# Altium PCB Sensor_Box_CAN_Shutter_CTRL.PCBDOC (part 1 of 2)
Units mil, origin at the board's own origin, x right, y up, seen from the top; angles counter-clockwise.
Board outline 1496.06 x 1407.48 mil, 2 copper layers (Top, Bot), stack 61.855 mil thick; 75 components, 60 nets, 235 pads, 72 vias.
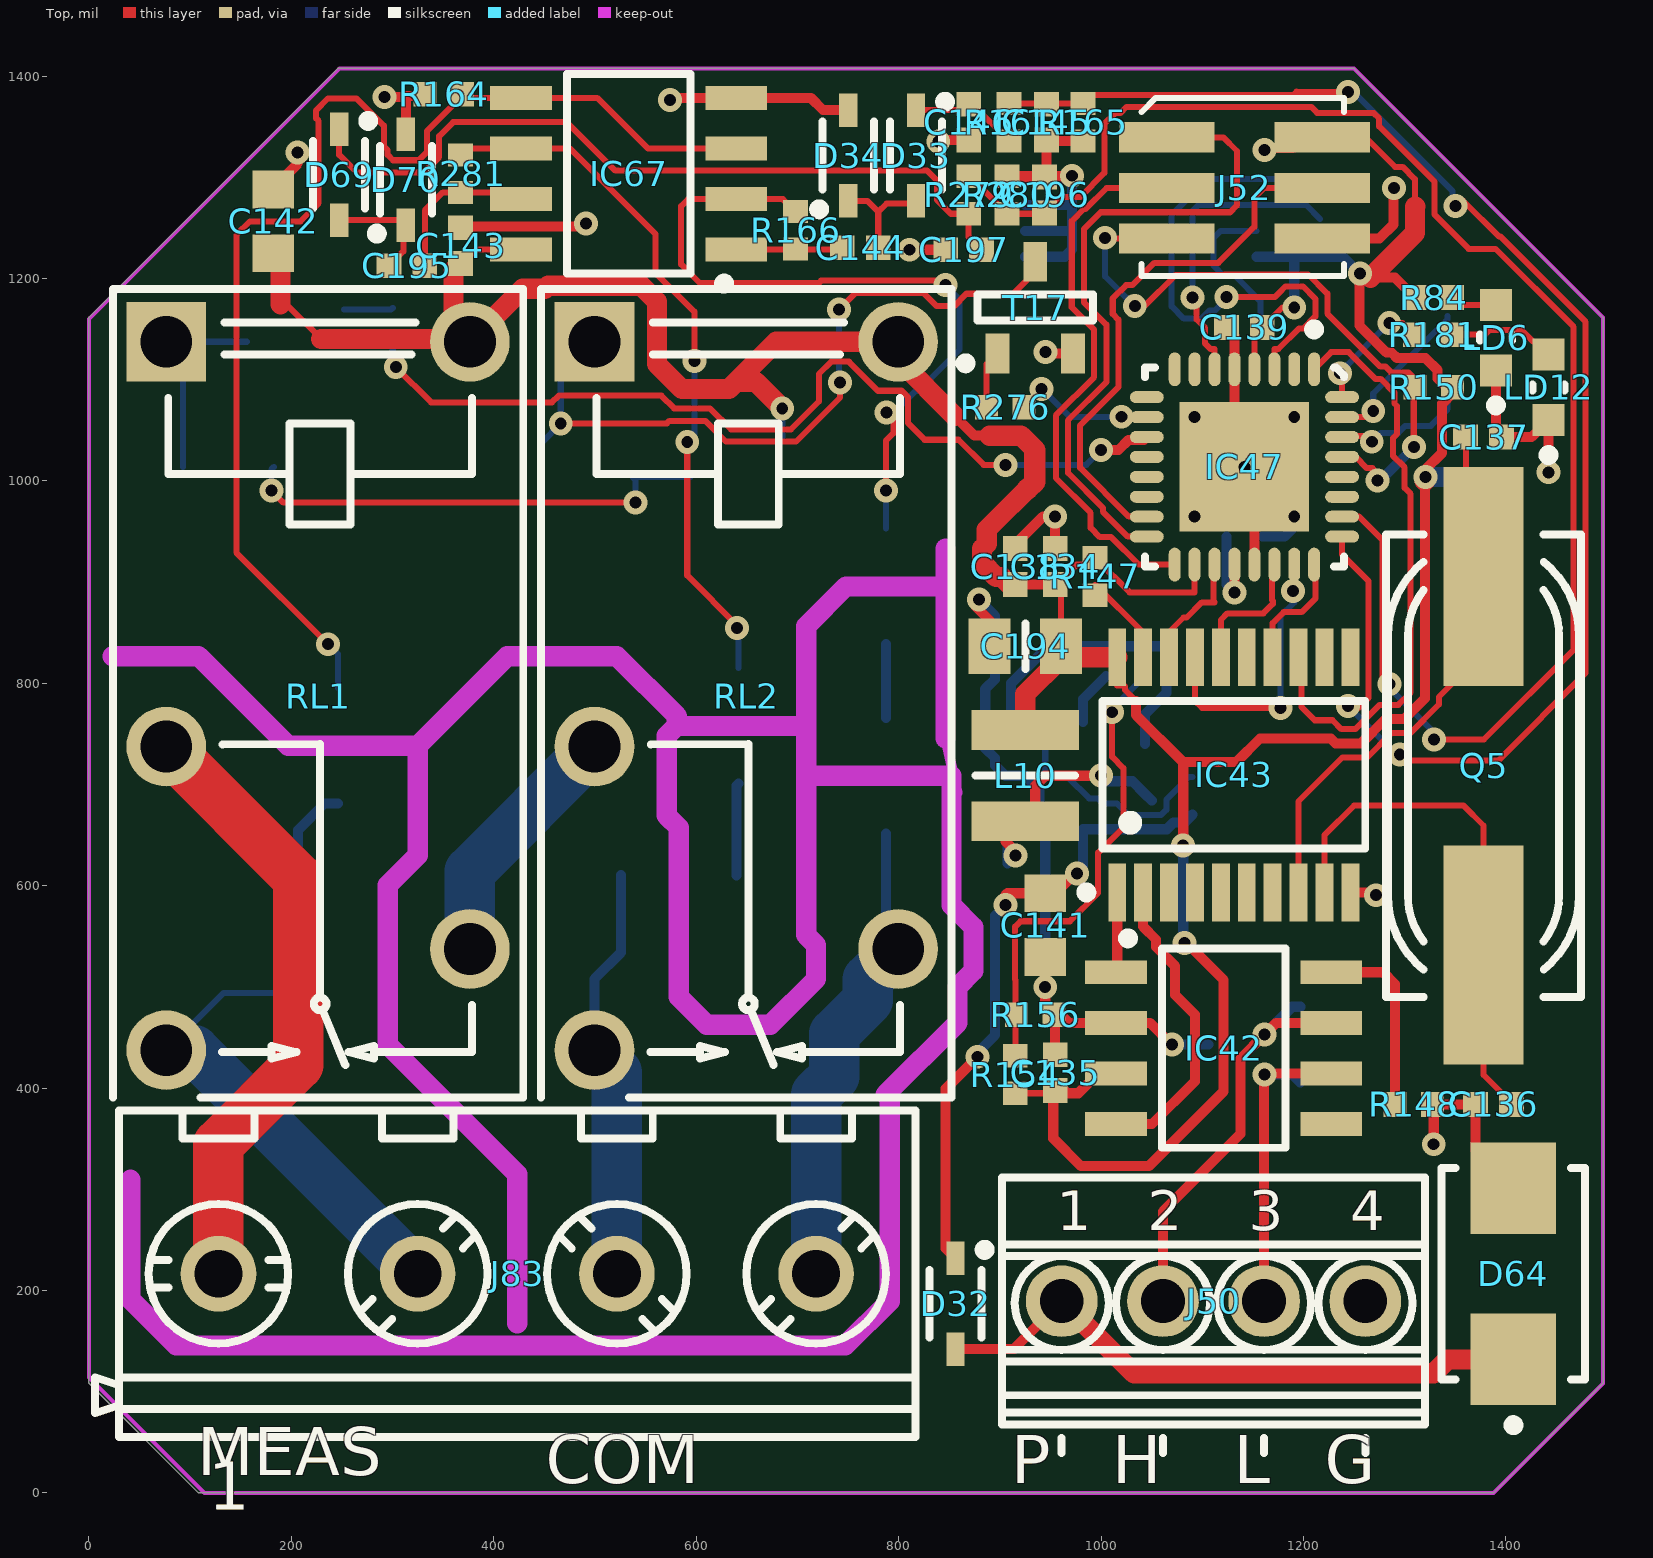
[diagram p0: Top view]
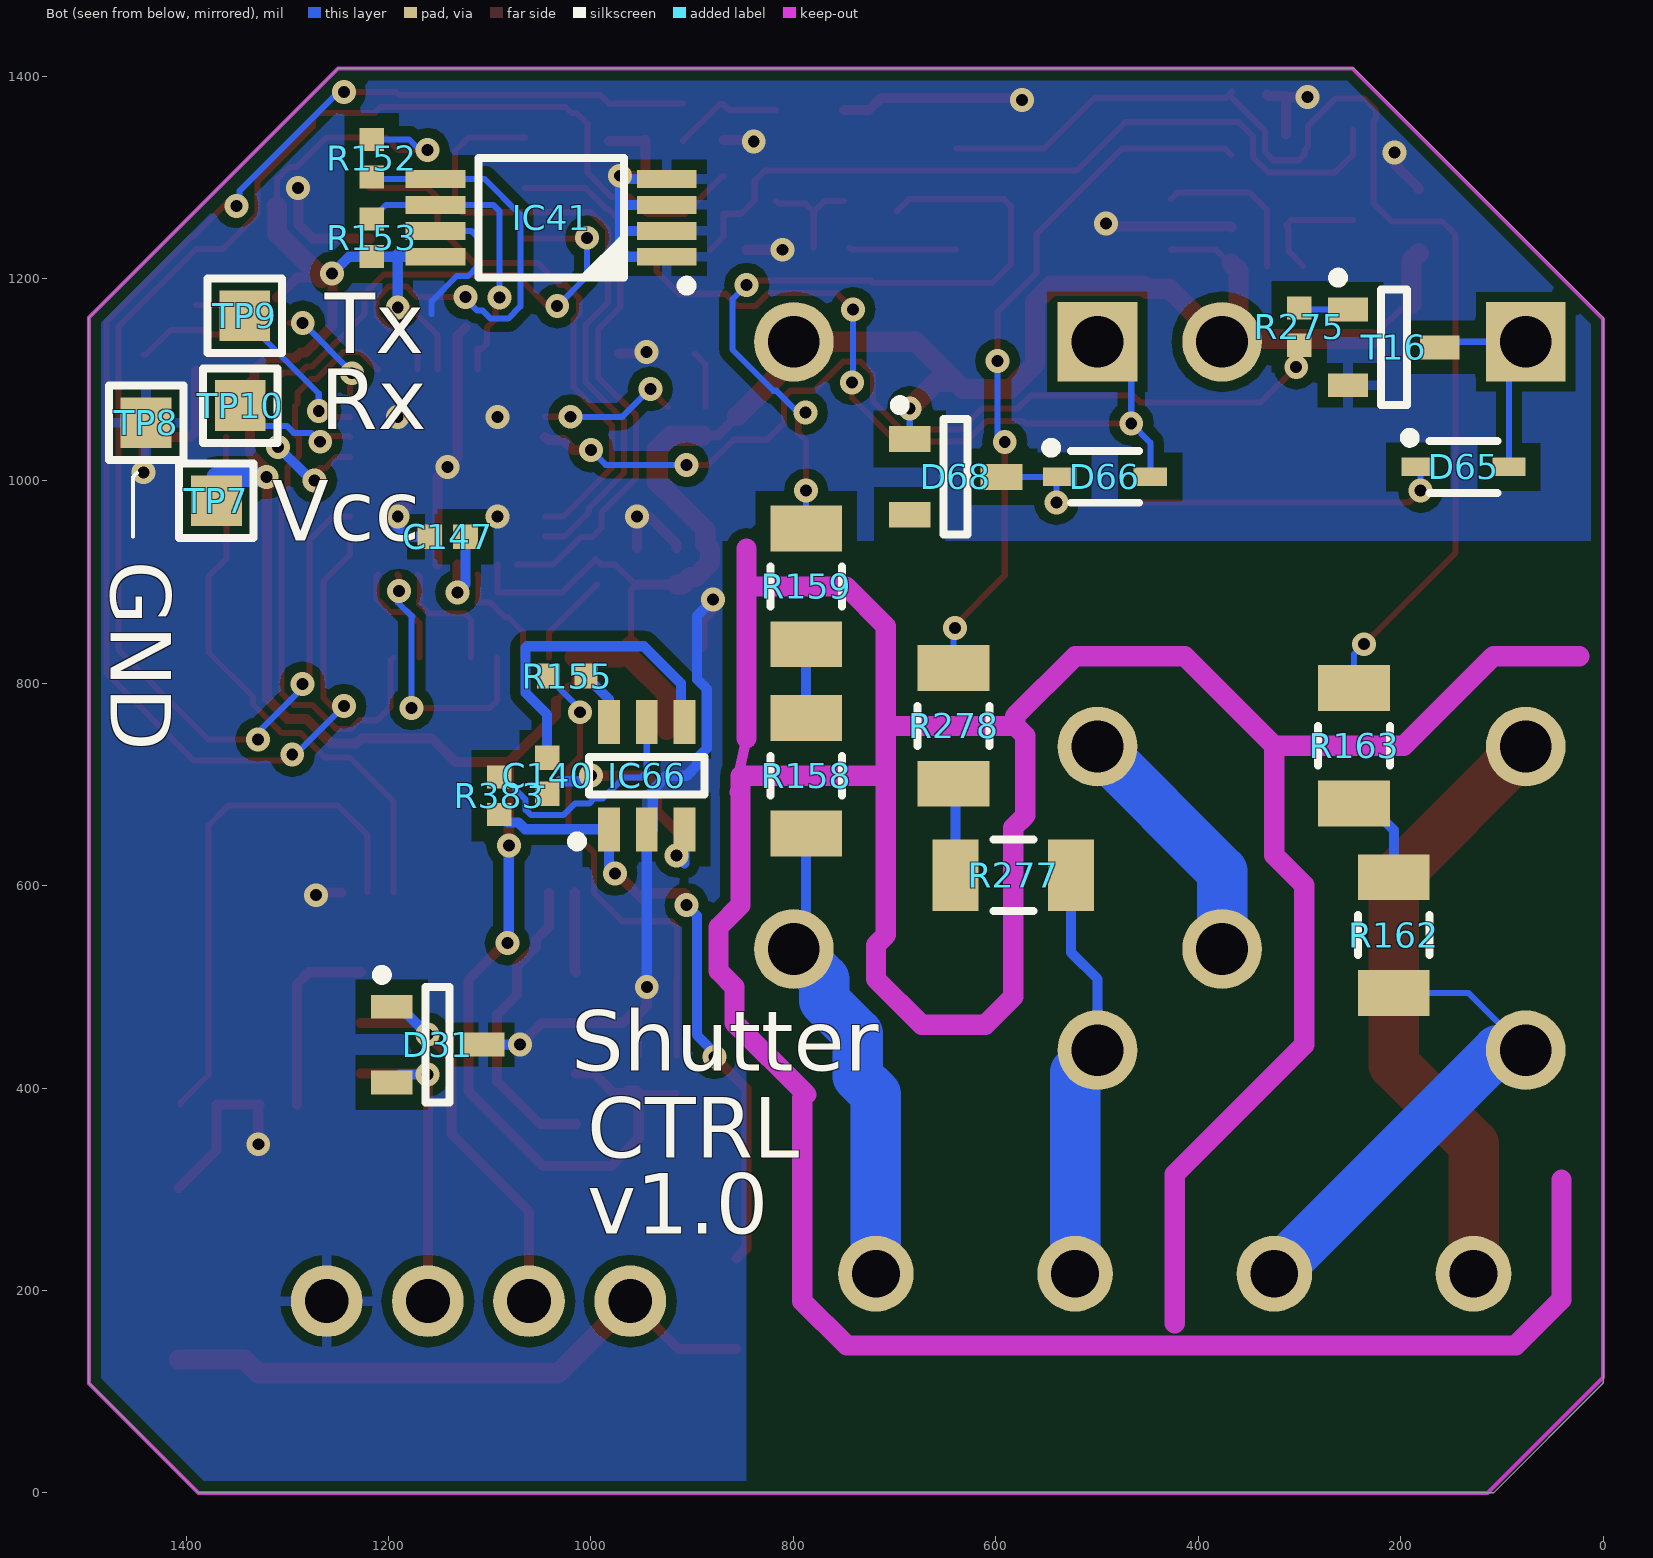
[diagram p1: Bot view, seen from below]
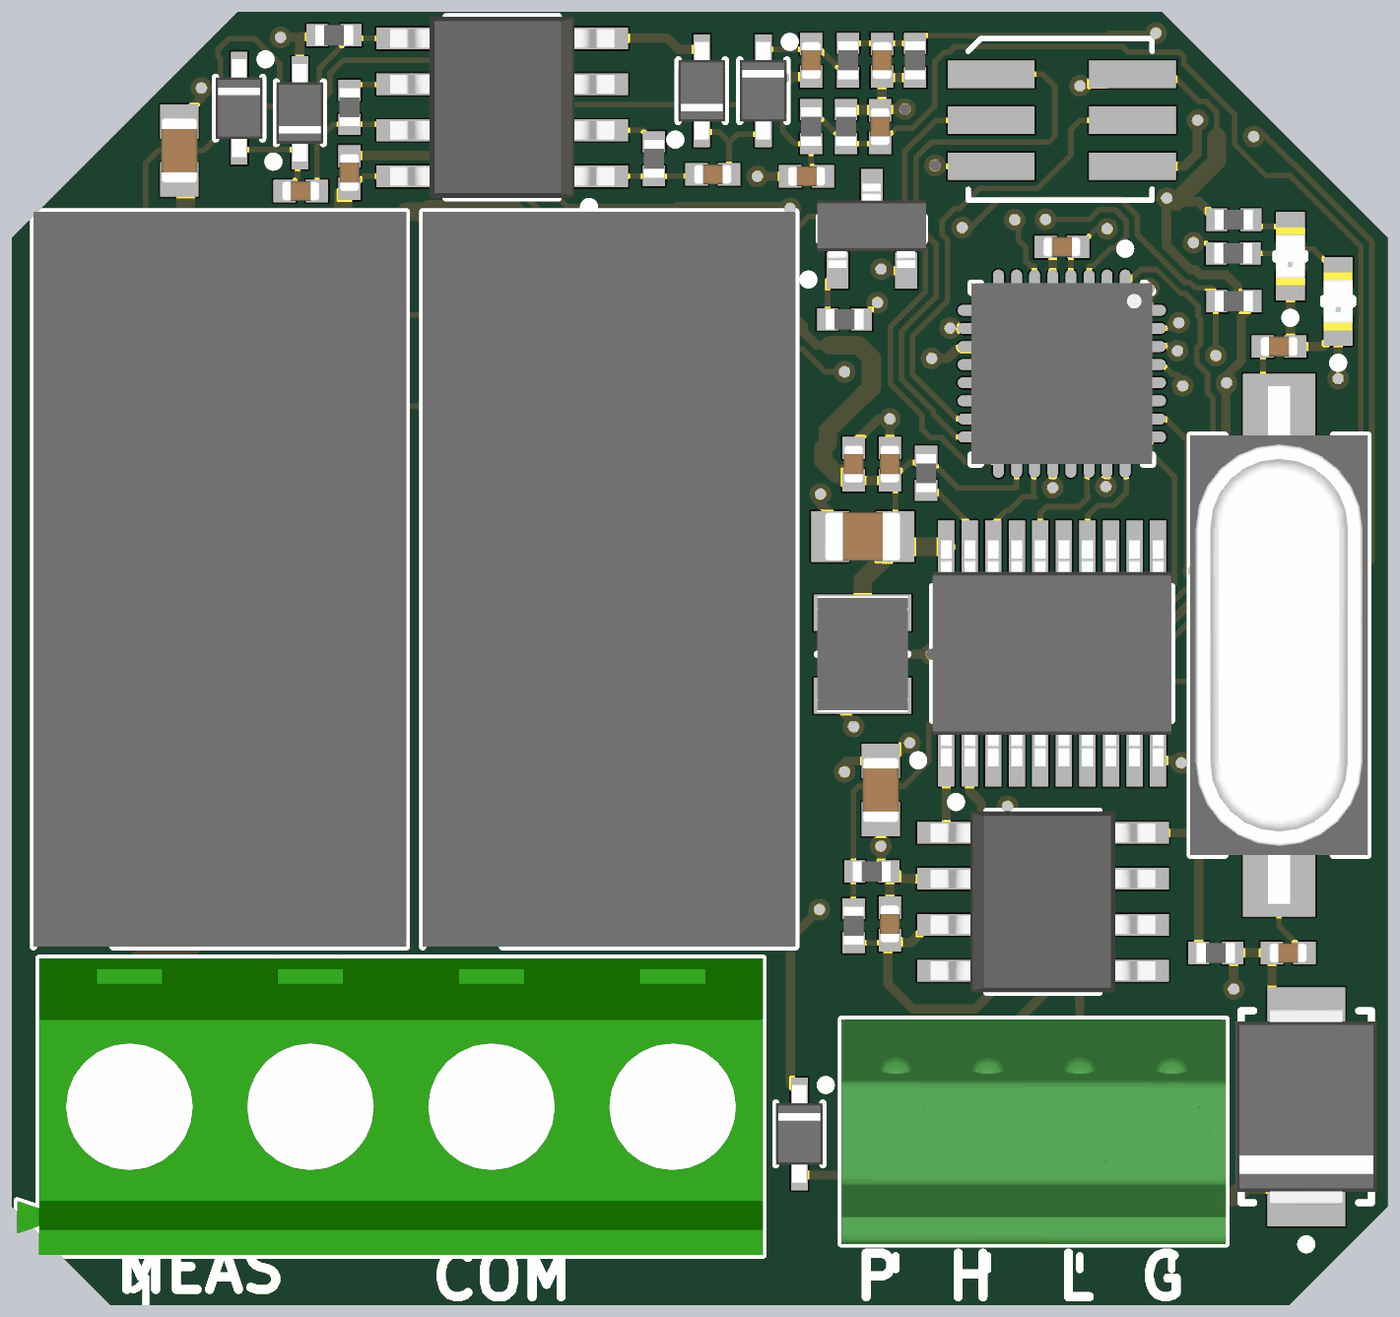
[diagram p2: 3D render of the assembled board from above, using the file's embedded part models]
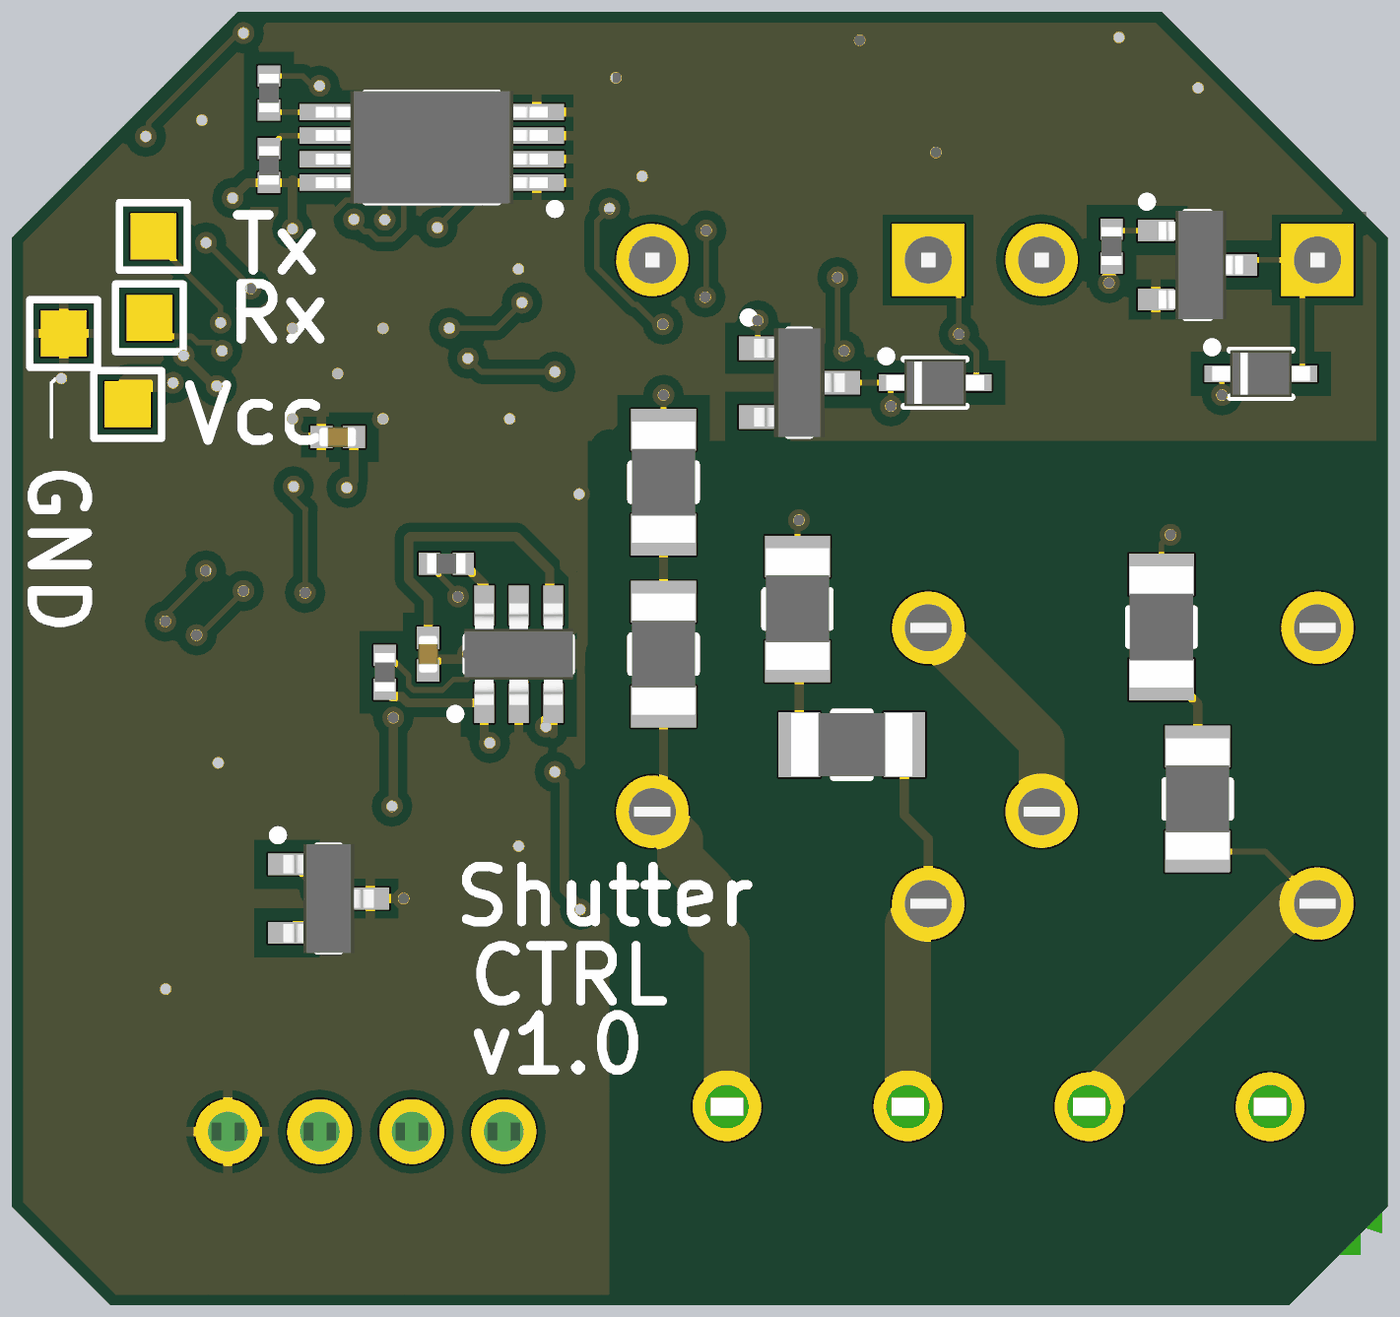
[diagram p3: 3D render of the assembled board from below, using the file's embedded part models]

## Layer stack, top to bottom
TopSolder: solder mask 0.4, Solder Resist, Dk 3.5
Top: signal copper 1.4
Dielectric1: core 59.0551, FR-4, Dk 4.8
Bot: signal copper 1.4
BottomSolder: solder mask 0.4, Solder Resist, Dk 3.5

## Board outline
0,108.27 0,1161.42 246.06,1407.48 1250,1407.48 1496.06,1161.42 1496.06,108.27 1387.8,0 108.27,0

## Design rules (kind name [scope] priority, off if disabled: settings)
Clearance [All] p1: gap=6 ignorepadtopadclearanceinfootprint=FALSE except(10: Arc-Poly Track-Poly THPad-Poly Via-Poly Fill-Poly Poly-Poly Poly-Region Poly-Text Poly-Hole; 15: SMDPad-Poly)
ComponentClearance [All] p1: gap=10 collisioncheckmode=3 verticalgap=0 showdistances=FALSE
DiffPairsRouting [All] p1: maxlimit=10 minlimit=5 mostfreqgap=5 toplayer_minwidth=5 toplayer_maxwidth=15 toplayer_prefwidth=10 bottomlayer_minwidth=5 bottomlayer_maxwidth=15 bottomlayer_prefwidth=10 maxuncoupledlength=500
FabricationTestPointUsage TestPointUsage [All] p1: valid=0 allowmultiple=FALSE
FabricationTestpoint Testpoint [All] p1: side=3 testpointundercomponent=TRUE minsize=40 maxsize=100 preferedsize=60 minholesize=20 maxholesize=40 preferedholesize=32 testpointgrid=1 allowsidetop=TRUE allowsidebottom=TRUE usegrid=TRUE gridtolerance=0.01
HoleSize [All] p1: absolutevalues=TRUE maxlimit=150 minlimit=1 maxpercent=80.000 minpercent=20.000
HoleToHoleClearance [All] p1: gap=1 allowstackedmicrovias=TRUE
MinimumSolderMaskSliver [All] p1: minsoldermaskwidth=0
PlaneClearance [All] p1: clearance=10
PlaneConnect [All] p1: planeconnectstyle=Direct reliefexpansion=20 reliefentries=4 reliefconductorwidth=10 reliefairgap=10
PolygonConnect PolygonConnect_pad [(InPadClass('All Pads'))] p1: connectstyle=Relief reliefconductorwidth=10 reliefentries=4 polygonreliefangle="90 Angle" airgapwidth=10
PolygonConnect [All] p2: connectstyle=Direct reliefconductorwidth=10 reliefentries=4 polygonreliefangle="45 Angle" airgapwidth=10
RoomDefinition Sensor_Box_CAN_Shutter_CTRL [InComponentClass('Sensor_Box_CAN_Shutter_CTRL')] p1 off: confinementstyle=ConfineIn formatcopy=TRUE lockcomponents=FALSE outline 1344.48,-2041.35 8539.34,-2041.35 8539.34,-1106.31 1344.48,-1106.31
RoutingVias RoutingVias_PWR [InNetClass('PWR')] p1: holewidth=31.5 width=47.24 viastyle="Through Hole" minholewidth=19.68 minwidth=31.5 maxholewidth=31.5 maxwidth=47.24
RoutingVias [All] p2: holewidth=11.81 width=23.62 viastyle="Through Hole" minholewidth=11.81 minwidth=23.62 maxholewidth=11.81 maxwidth=23.62
SilkToSilkClearance [All] p1: silktosilkclearance=0
SilkToSolderMaskClearance SilkscreenOverComponentPads [IsPad] p1: minsilkscreentomaskgap=0 clearancetoexposedcopper=TRUE
SolderMaskExpansion [All] p1: expansion=2
Width Width_PWR [InNetClass('PWR')] p1: maxlimit=50 minlimit=10 preferedwidth=20
Width [InNetClass('All Nets')] p2: maxlimit=50 minlimit=6 preferedwidth=10
19 further rules are at their usual default settings.

## Components (designator, comment, footprint, x,y, rotation, side; value= is the part's Value field where it differs from the comment)
C134 "100nF" CAPC1005X55N 954.72,915.35 r270 top
C135 "100nF" CAPC1005X55N 954.72,415.35 r270 top
C136 "18pF" CAPC1005X55N 1387.8,383.86 r0 top
C137 "18pF" CAPC1005X55N 1377.95,1043.31 r180 top
C138 "1uF" CAPC1005X55N 915.35,915.35 r90 top
C139 "100nF" CAPC1005X55N 1141.73,1151.57 r0 top
C140 "1uF" CAPC1005X55N 1043.31,708.66 r270 bottom
C141 "22uF" CAPC1709X100N 944.88,561.02 r90 top
C142 "22uF" CAPC1709X100N 182.18,1256.45 r270 top
C143 "1uF" CAPC1005X55N 367.18,1232.45 r270 top
C144 "1uF" CAPC1005X55N 762.18,1230.45 r0 top
C145 "1uF" CAPC1005X55N 946.18,1354.45 r270 top
C146 "1uF" CAPC1005X55N 869.18,1354.45 r270 top
C147 "1uF" CAPC1005X55N 1141.73,944.88 r0 bottom
C194 "10uF" CAPC2012X135N 925.2,836.61 r180 top
C195 "1uF" CAPC1005X55N 314.18,1212.45 r180 top
C196 "1uF" CAPC1005X55N 944.18,1282.45 r90 top
C197 "1uF" CAPC1005X55N 864.17,1228.35 r180 top
D31 "PESD1CAN-UX" SOT95P237X112-3N 1151.57,442.91 r180 bottom
D32 "1N4148WS" SODFL2512X100N 856.3,187.01 r270 top
D33 "1N4148WS" SODFL2512X100N 817.18,1321.45 r270 top
D34 "1N4148WS" SODFL2512X100N 750.18,1321.45 r90 top
D64 "SMBJ15A" DIOM5336X265N 1407.48,216.54 r90 top
D65 "1N4148WS" SODFL2512X100N 137.8,1013.78 r180 bottom
D66 "1N4148WS" SODFL2512X100N 492.13,1003.94 r180 bottom
D68 "BZX84C15" SOT95P240X130-3N 639.76,1003.94 r180 bottom
D69 "1N4148WS" SODFL2512X100N 247.18,1302.45 r270 top
D70 "1N4148WS" SODFL2512X100N 313.18,1297.45 r90 top
IC41 "M24256-BRDW6" SOP65P640X120-8N 1039.37,1259.84 r0 bottom
IC42 "MCP2551-I/SN" SOIC127P600X175-8N 1121.18,439.45 r0 top
IC43 "MCP2515-I/ST" SOP65P640X110-20N 1131.18,709.45 r90 top
IC47 "ATMEGA328PB-MU" QFN50P500X500X100-33N-S325 1141.73,1013.78 r270 top
IC66 "AP65111AWU-7" SOT95P280X100-6N 944.88,708.66 r90 bottom
IC67 "LM358AD" SOIC127P600X175-8N 533.18,1303.45 r180 top
J50 "=Family" PHOENIX_1725672 1111.18,189.45 r0 top
J52 "ZL322-2X3P or PLHTD6S-TR-CV" ZL322-2X3P 1141.73,1289.37 r270 top
J83 "=Family" TYCO_282836-4 423.23,216.54 r0 top
L10 "6.8uH" IND_WALSIN_WLPN3030 925.2,708.66 r90 top
LD6 "Green" LED_KINGBRIGHT_KPH-1608CGCK 1390.18,1141.45 r90 top
LD12 "Green" LED_KINGBRIGHT_KPH-1608CGCK 1442.18,1092.45 r90 top
Q5 "20MHz" XTAL1160X490X430 1377.95,718.5 r90 top
R84 "10k" RESC1005X40N 1328.74,1181.1 r0 top
R147 "10k" RESC1005X40N 994.09,905.51 r270 top
R148 "4k7" RESC1005X40N 1309.06,383.86 r180 top
R150 "10k" RESC1005X40N 1328.74,1092.52 r180 top
R152 "1k" RESC1005X40N 1216.54,1318.9 r90 bottom
R153 "1k" RESC1005X40N 1216.54,1240.16 r270 bottom
R154 "68k" RESC1005X40N 915.35,413.39 r270 top
R155 "68k" RESC1005X40N 1023.62,807.09 r0 bottom
R156 "13k" RESC1005X40N 935.04,472.44 r180 top
R158 "1M" RESC3216X65N 787.4,708.66 r90 bottom
R159 "1M" RESC3216X65N 787.4,895.67 r90 bottom
R161 "10k" RESC1005X40N 909.18,1354.45 r90 top
R162 "1M" RESC3216X65N 206.69,551.18 r90 bottom
R163 "1M" RESC3216X65N 246.06,738.19 r90 bottom
R164 "10k" RESC1005X40N 350.39,1381.89 r180 top
R165 "10k" RESC1005X40N 982.18,1354.45 r90 top
R166 "10k" RESC1005X40N 698.18,1247.45 r90 top
R181 "10k" RESC1005X40N 1328.18,1144.45 r0 top
R275 "1k" RESC1005X40N 300.18,1152.45 r90 bottom
R276 "1k" RESC1005X40N 905.51,1072.83 r180 top
R277 "1M" RESC3216X65N 582.68,610.24 r0 bottom
R278 "1M" RESC3216X65N 641.73,757.87 r90 bottom
R279 "10k" RESC1005X40N 869.18,1282.45 r90 top
R280 "10k" RESC1005X40N 907.18,1282.45 r270 top
R281 "10k" RESC1005X40N 367.18,1303.45 r90 top
R383 "68k" RESC1005X40N 1090.55,688.98 r270 bottom
RL1 "REL_OMRON_G5Q-1" REL_OMRON_G5Q-1 236.22,787.4 r270 top value=5VDC
RL2 "REL_OMRON_G5Q-1" REL_OMRON_G5Q-1 659.45,787.4 r270 top value=5VDC
T16 "BC817-25" SOT95P230X110-3N 206.69,1131.89 r180 bottom
T17 "BC817-25" SOT95P230X110-3N 935.04,1171.26 r90 top
TP7 "Test Point" TPS127 1370.08,980.31 r270 bottom
TP8 "Test Point" TPS127 1439.66,1057.45 r270 bottom
TP9 "Test Point" TPS127 1342.18,1162.99 r270 bottom
TP10 "Test Point" TPS127 1346.46,1074.41 r270 bottom

## Footprints (in the part's own frame and the unit in brackets; to place one, negate y for a bottom-side part, rotate by r counter-clockwise, add the part's x,y. Pads: shape width x height; smd on the part's side, far side on the other; paste and mask are expansions set on the pad)
CAPC1005X55N [mm] "Chip Capacitor, Body 1.0x0.55mm, IPC Medium Density"
  rect 0.62x0.62 smd: 1(-0.45,0) 2(0.45,0)
  body extent -0.52,-0.27 0.53,0.28, height 0.55
CAPC1709X100N [mm] "Capacitor,non-Polarized, Chip;1.65mm L X 0.85mm W X 1.00mm H, IPC Medium Density"
  rect 0.95x1.05 smd: 1(-0.8,0) 2(0.8,0)
  body extent -0.9,-0.5 0.9,0.5, height 1
CAPC2012X135N [mm] "Chip Capacitor, Body 2.0x1.25mm, IPC Medium Density"
  rect 1.05x1.4 smd: 1(-0.9,0) 2(0.9,0)
  silkscreen extent 0,-0.58 0,0.58, body extent -1.05,-0.67 1.05,0.68, height 1.25
DIOM5336X265N [mm] "DO-214-AA/SMB Diode, Molded Body; 5.34mm L X 3.625mm W X 2.65mm H, IPC Medium Density"
  rect 2.3x2.15 smd: 1(-2.15,0) 2(2.15,0)
  silkscreen extent -3.92,-1.8 2.65,1.8, body extent -2.7,-1.95 2.7,1.95, height 2.4
IND_WALSIN_WLPN3030 [mm] "Miniature Surface Mount Power Inductors, 3mm L X 3mm W X 1.5mm H"
  rect 1x2.7 smd: 1(-1.145,0) 2(1.145,0)
  silkscreen extent 0,-1.25 0,1.25, body extent -1.6,-1.25 1.6,1.25, height 2.3
LED_KINGBRIGHT_KPH-1608CGCK [mm] "SMT Green LED, Case 0603, Body L 1.6 x W 0.8mm H 0.65mm"
  rect 0.8x0.8 smd: 1(-0.825,0) 2(0.825,0)
  silkscreen extent -1.82,-0.4 0.08,0.4, body extent -0.8,-0.4 0.8,0.4, height 0.65
PHOENIX_1725672 [mm] "Micro PCB Terminal Block, Pitch 2.54mm, 4 Positions, Screw Connection"
  round 1.8 hole 1.1: 1(-3.81,0) 2(-1.27,0) 3(1.27,0) 4(3.81,0)
  silkscreen extent -5.31,-3.81 5.31,3.1, body extent -5.31,-3.1 5.31,3.1, height 8.5
QFN50P500X500X100-33N-S325 [mm] "QFN, (MO-220-VHHD-4) 0.50mm pitch,square; 8 pin X 8 pin, 5mm X 5mm X 1.00mm H body (w/thermal tab 3.25 X 3.25mm),  IPC Medium Density"
  oval 0.85x0.3 smd: 1(-2.45,1.75) 2(-2.45,1.25) 3(-2.45,0.75) 4(-2.45,0.25) 5(-2.45,-0.25) 6(-2.45,-0.75) 7(-2.45,-1.25) 8(-2.45,-1.75) 17(2.45,-1.75) 18(2.45,-1.25) 19(2.45,-0.75) 20(2.45,-0.25) 21(2.45,0.25) 22(2.45,0.75) 23(2.45,1.25) 24(2.45,1.75)
  oval 0.3x0.85 smd: 9(-1.75,-2.45) 10(-1.25,-2.45) 11(-0.75,-2.45) 12(-0.25,-2.45) 13(0.25,-2.45) 14(0.75,-2.45) 15(1.25,-2.45) 16(1.75,-2.45) 25(1.75,2.45) 26(1.25,2.45) 27(0.75,2.45) 28(0.25,2.45) 29(-0.25,2.45) 30(-0.75,2.45) 31(-1.25,2.45) 32(-1.75,2.45)
  rect 3.25x3.25 smd: 33(0,0)
  silkscreen extent -3.57,-2.5 2.5,2.5, body extent -2.5,-2.5 2.5,2.5, height 1
REL_OMRON_G5Q-1 [mm] "5 Leads, Row Spacing 7.62 mm; Body 20.3mm x 10.3mm OMRON_G5Q-1 Series"
  rect 2x2 hole 1.3: 1(-8.89,-4.06)
  round 2 hole 1.3: 2(1.27,-4.06) 3(8.89,-4.06) 4(6.35,3.56) 5(-8.89,3.56)
  silkscreen extent -10.22,-5.4 10.08,4.9, body extent -10.22,-5.4 10.08,4.9, height 16.2
RESC1005X40N [mm] "Chip Resistor, EIA 0402, Metric 1005, Body 1.0x0.5mm, IPC Medium Density"
  rect 0.58x0.62 smd: 1(-0.47,0) 2(0.47,0)
  body extent -0.52,-0.27 0.53,0.28, height 0.4
RESC3216X65N [mm] "Chip Resistor, EIA 1206, Metric 3216, Body 3.2x1.6mm, IPC Medium Density"
  rect 1.15x1.8 smd: 1(-1.45,0) 2(1.45,0)
  silkscreen extent -0.5,-0.9 0.5,0.9, body extent -1.67,-0.87 1.68,0.88, height 0.65
SODFL2512X100N [mm] "SODFL Diode; 1.70mm W X 1.25mm L X 1.00mm H body, IPC Medium Density"
  rect 0.84x0.46 smd: 1(-1.14,0) 2(1.14,0)
  silkscreen extent -1.47,-0.65 0.85,0.86, body extent -1.35,-0.65 1.35,0.65, height 1
SOIC127P600X175-8N [mm] "SOIC 8, Pitch 1.27mm - Body 4x5mm, IPC Medium Density"
  rect 1.55x0.6 smd: 1(-2.7,1.905) 2(-2.7,0.635) 3(-2.7,-0.635) 4(-2.7,-1.905) 5(2.7,-1.905) 6(2.7,-0.635) 7(2.7,0.635) 8(2.7,1.905)
  silkscreen extent -2.52,-2.5 1.55,2.88, body extent -3.1,-2.5 3.1,2.5, height 1.75
SOP65P640X110-20N [mm] "SOP, 20-Leads, Body 6.6x4.5mm (max), Pitch 0.65mm, IPC Medium Density"
  rect 1.45x0.45 smd: 1(-2.95,2.925) 2(-2.95,2.275) 3(-2.95,1.625) 4(-2.95,0.975) 5(-2.95,0.325) 6(-2.95,-0.325) 7(-2.95,-0.975) 8(-2.95,-1.625) 9(-2.95,-2.275) 10(-2.95,-2.925) 11(2.95,-2.925) 12(2.95,-2.275) 13(2.95,-1.625) 14(2.95,-0.975) 15(2.95,-0.325) 16(2.95,0.325) 17(2.95,0.975) 18(2.95,1.625) 19(2.95,2.275) 20(2.95,2.925)
  silkscreen extent -3.07,-3.3 1.85,3.82, body extent -3.12,-3.3 3.12,3.3, height 1.19
SOP65P640X120-8N [mm] "SOP, 0.65mm pitch; 8 pin, 4.40mm W X 3.00mm L X 1.20mm H body, IPC Medium Density"
  rect 1.5x0.45 smd: 1(-2.9,0.975) 2(-2.9,0.325) 3(-2.9,-0.325) 4(-2.9,-0.975) 5(2.9,-0.975) 6(2.9,-0.325) 7(2.9,0.325) 8(2.9,0.975)
  silkscreen extent -3.52,-1.5 1.83,1.82, body extent -3.2,-1.55 3.2,1.55, height 1.2
SOT95P230X110-3N [mm] "SOT23, 3 pin, Pitch 0.95mm - 1.3mm W X 2.9mm L X 1.1mm H, IPC Medium Density"
  rect 1x0.6 smd: 1(-1.15,0.95) 2(-1.15,-0.95) 3(1.15,0)
  silkscreen extent -1.53,-1.45 0.33,1.87, body extent -1.08,-1.5 1.25,1.5, height 1.1
SOT95P237X112-3N [mm] "SOT, 0.95mm, pitch; 3 pin,1.30mm W X 2.92mm L X 1.12mm H body, IPC Medium Density"
  rect 1.05x0.6 smd: 1(-1.15,0.95) 2(-1.15,-0.95) 3(1.15,0)
  silkscreen extent -1.53,-1.45 0.3,1.87, body extent -1.25,-1.5 1.25,1.5, height 1.1
SOT95P240X130-3N [mm] "SOT23 3-Leads, Pitch 0.95mm - Body 1.3x2.9mm, IPC Medium Density"
  rect 1.05x0.65 smd: 1(-1.15,0.95) 2(-1.15,-0.95) 3(1.15,0)
  silkscreen extent -1.53,-1.45 0.3,1.92, body extent -1.25,-1.5 1.25,1.5, height 1.3
SOT95P280X100-6N [mm] "SOT23, 0.95mm pitch; 6 pin, 1.625mm W X 2.90mm L X 1.00mm H body, IPC Medium Density"
  rect 1.1x0.55 smd: 1(-1.35,0.95) 2(-1.35,0) 3(-1.35,-0.95) 4(1.35,-0.95) 5(1.35,0) 6(1.35,0.95)
  silkscreen extent -1.77,-1.45 0.48,1.88, body extent -1.4,-1.5 1.4,1.5, height 1
TPS127 [mil] "1.27 x  1.27mm SMD Test Point Area"
  rect 50x50 smd paste-50: 1(0,0)
  silkscreen extent -37,-37 37,37
TYCO_282836-4 [mm] "15.5A, 300V, Terminal Block, Pitch 5mm, 4 Positions, Screw Connection"
  round 1.9 hole 1.2: 1(-7.5,0) 2(-2.5,0) 3(2.5,0) 4(7.5,0)
  silkscreen extent -10.6,-4.1 10,4.1, body extent -10.6,-4.1 10,4.1, height 10
XTAL1160X490X430 [mm] "HC49/4H SMX Case, SMD Cristal, Body 11.6x4.9mm"
  rect 5.5x2 smd: 1(-4.75,0) 2(4.75,0)
  silkscreen extent -5.8,-2.45 5.8,2.45, body extent -7.15,-2.45 7.15,2.45, height 4.3
ZL322-2X3P [mm] "SMT 1.27 mm dual goldpin"
  rect 0.76x2.4 smd: 1(-1.27,-1.95) 2(-1.27,1.95) 3(0,-1.95) 4(0,1.95) 5(1.27,-1.95) 6(1.27,1.95)
  silkscreen extent -2.25,-2.59 2.21,2.49, body extent -2.05,-2.15 2.03,2.15, height 4.5

## Part data
C134 C135 C139: library part CC0402_100NF_16V_10%_X5R, "Non-polarised capacitor", Case=0402, Manufacturer=GENERIC, Manufacturer1 ComponentHeight=0.55mm, Manufacturer1 Example=MURATA, Manufacturer1 Part Number=GRM155R61C104KA88D, Tolerance=±10%, Voltage=16V, Author="CERN DEM JLC", Component Type=Standard, CreateDate=10.12.2013, HelpURL=\\cern.ch\dfs\Applications\Altium\Datasheets\CC0402_X5R_MURATA_GRM.pdf, LatestRevisionDate=10.12.2013, Manufacturer Part Number=CC0402_100NF_16V_10%_X5R, Mounted=Yes, Part Description="SMD Multilayer Chip Ceramic Capacitor", Part Number=CC0402_100NF_16V_10%_X5R, Pin Count=2, Sense=No, SMD=Yes, Socket=No, Status=None, TC=X5R
C136 C137: library part CC0402_18PF_50V_5%_C0G, "Non-polarised capacitor", Case=0402, Manufacturer=GENERIC, Manufacturer1 ComponentHeight=0.55mm, Manufacturer1 Example=KEMET, Manufacturer1 Part Number=C0402C180J5GACTU, Tolerance=±5%, Voltage=50V, Author="CERN DEM JLC", Component Type=Standard, CreateDate=04.10.2016, HelpURL="\\cern.ch\dfs\Applications\Altium\Datasheets\CC0805_C0G_KEMET_(Commercial Grade).pdf", LatestRevisionDate=04.10.2016, Manufacturer Part Number=CC0402_18PF_50V_5%_C0G, Mounted=Yes, Part Description="SMD Multilayer Chip Ceramic Capacitor", Part Number=CC0402_18PF_50V_5%_C0G, Pin Count=2, Sense=No, SMD=Yes, Socket=No, Status=Preferred, TC=C0G/NP0
C138 C140 C143 C144 C145 C146 C147 C195 C196 C197: library part CC0402_1UF_16V_10%_X5R, "Non-polarised capacitor", Case=0402, Manufacturer=GENERIC, Manufacturer1 ComponentHeight=0.55mm, Manufacturer1 Example=TDK, Manufacturer1 Part Number=C1005X5R1C105KT, Tolerance=±10%, Voltage=16V, Author="CERN DEM JLC", Component Type=Standard, CreateDate=25.10.2012, HelpURL=\\cern.ch\dfs\Applications\Altium\Datasheets\CC0402_X5R_TDK_C.pdf, LatestRevisionDate=25.10.2012, Manufacturer Part Number=CC0402_1UF_16V_10%_X5R, Mounted=Yes, Part Description="SMD Multilayer Chip Ceramic Capacitor", Part Number=CC0402_1UF_16V_10%_X5R, Pin Count=2, Sense=No, SMD=Yes, Socket=No, Status=Preferred, TC=X5R
C141 C142: library part CC0603_22UF_6.3V_20%_X5R, "Non-polarised capacitor", Case=0603, Manufacturer=GENERIC, Manufacturer1 ComponentHeight=1mm, Manufacturer1 Example=TDK, Manufacturer1 Part Number=C1608X5R0J226M080AC, Tolerance=±20%, Voltage=6.3V, Author="CERN DEM JLC", Component Type=Standard, CreateDate=16.12.2013, HelpURL=\\cern.ch\dfs\Applications\Altium\Datasheets\CC0603_X5R_TDK_C.pdf, LatestRevisionDate=13.09.2016, Manufacturer Part Number=CC0603_22UF_6.3V_20%_X5R, Mounted=Yes, Part Description="SMD Multilayer Chip Ceramic Capacitor", Part Number=CC0603_22UF_6.3V_20%_X5R, Pin Count=2, Sense=No, SMD=Yes, Socket=No, Status=None, TC=X5R
C194: library part CC0805_10UF_16V_10%_X5R, "Non-polarised capacitor", Case=0805, Manufacturer=GENERIC, Manufacturer1 ComponentHeight=1.4mm, Manufacturer1 Example=KEMET, Manufacturer1 Part Number=C0805C106K4PAC, Tolerance=±10%, Voltage=16V, Author="CERN DEM JLC", Component Type=Standard, CreateDate=03.12.2007, HelpURL=\\cern.ch\dfs\Applications\Altium\Datasheets\CC1206_X5R_KEMET.pdf, LatestRevisionDate=03.12.2007, Manufacturer Part Number=CC0805_10UF_16V_10%_X5R, Mounted=Yes, Part Description="SMD Multilayer Chip Ceramic Capacitor", Part Number=CC0805_10UF_16V_10%_X5R, Pin Count=2, Sense=No, SMD=Yes, Socket=No, Status=Preferred, TC=X5R
D31: "TVS Diode for CAN", Case=SOT-23, Manufacturer=Nexperia, Power=400W, Voltage=24V, Author="CERN DEM JLC", Bonding=No, ComponentHeight=1.12mm, Component Type=Standard, CreateDate=03.09.2014, Device=PESD1CAN-UX, HelpURL=\\cern.ch\dfs\Applications\Altium\Datasheets\SM712.TCT.pdf, LatestRevisionDate=13.01.2015, Manufacturer Part Number=PESD1CAN-UX, Mounted=Yes, PackageDescription="SOT, 0.95mm, pitch; 3 pin,1.30mm W X 2.92mm L X 1.12mm H body, IPC Medium Density", Part Description="TVS Diode for CAN", Part Number=PESD1CAN-UX, Pin Count=3, PressFit=No, Sense=No, SMD=Yes, Socket=No
D32 D33 D34 D65 D66 D69 D70: "Diode", Case=SOD-323F, Manufacturer="FAIRCHILD SEMICONDUCTOR", Power=150mA, Voltage=75V, Author="CERN DEM JLC", Bonding=No, ComponentHeight=1mm, Component Type=Standard, CreateDate=12.05.2011, Device=1N4148WS, HelpURL=\\cern.ch\dfs\Applications\Altium\Datasheets\1N4148WS.pdf, LatestRevisionDate=12.05.2011, Manufacturer Part Number=1N4148WS, Mounted=Yes, PackageDescription="SODFL Diode; 1.70mm W X 1.25mm L X 1.00mm H body, IPC Medium Density", Part Description="Small Signal Diodes", Part Number=1N4148WS, Pin Count=2, PressFit=No, Sense=No, SMD=Yes, Socket=No
D64: "Zener Diode", Case=DO-214AA, Manufacturer="FAIRCHILD SEMICONDUCTOR", Power=600W, Voltage=15V, Author="CERN DEM JLC", Bonding=No, ComponentHeight=2.65mm, Component Type=Standard, CreateDate=08.12.2008, Device=SMBJ15A, HelpURL=\\cern.ch\dfs\Applications\Altium\Datasheets\SMBJ.pdf, LatestRevisionDate=19.12.2011, Manufacturer Part Number=SMBJ15A, Mounted=Yes, PackageDescription="DO-214-AA/SMB Diode, Molded Body; 5.34mm L X 3.625mm W X 2.65mm H, IPC Medium Density", Part Description="Uni-Directional Transient Voltage Suppressor Diode", Part Number=SMBJ15A, Pin Count=2, PressFit=No, Sense=No, SMD=Yes, Socket=No
D68: "Diode Zener Anode Pin 1 Cathode Pin 3 (Pas de pin 2)", Case=SOT23-3, Manufacturer="FAIRCHILD SEMICONDUCTOR", Power=350mW, Voltage=15V, Author="CERN DEM JLC", Bonding=No, ComponentHeight=1.3mm, Component Type=Standard, CreateDate=30.11.2011, Device=BZX84C15, HelpURL=\\cern.ch\dfs\Applications\Altium\Datasheets\BZX84C15.pdf, LatestRevisionDate=30.11.2011, Manufacturer Part Number=BZX84C15, Mounted=Yes, PackageDescription="SOT23 3-Leads, Pitch 0.95mm - Body 1.3x2.9mm, IPC Medium Density", Part Description="Zener Diode", Part Number=BZX84C15, Pin Count=3, PressFit=No, Sense=No, SMD=Yes, Socket=No
IC41: "256-Kbit Serial I²C Bus EEPROM", Case=TSSOP8, Manufacturer="ST MICROELECTRONICS", Part Number=M24256-BRDW6P, Author="CERN DEM MR", Bonding=No, ComponentHeight=1.2mm, Component Type=Standard, CreateDate=17.03.2016, Device=M24256-BRDW6, HelpURL=\\cern.ch\dfs\Applications\Altium\Datasheets\M24256-BRDW6P.pdf, LatestRevisionDate=17.03.2016, Manufacturer Part Number=M24256-BRDW6, Mounted=Yes, PackageDescription="SOP, 0.65mm pitch; 8 pin, 4.40mm W X 3.00mm L X 1.20mm H body, IPC Medium Density", Part Description="256-Kbit Serial I²C Bus EEPROM", Pin Count=8, PressFit=No, Sense=No, SMD=Yes, Socket=No
IC42: "High-Speed CAN Transceiver, 8-Pin SOIC, Industrial Temperature", Case=SOIC8, Manufacturer="MICROCHIP TECHNOLOGY", Author=GK, Bonding=No, ComponentHeight=1.75mm, Component Type=Standard, CreateDate=07.09.2016, Device=MCP2551-I/SN, LatestRevisionDate=07.09.2016, Manufacturer Part Number=MCP2551-I/SN, Mounted=Yes, PackageDescription="SOIC 8, Pitch 1.27mm - Body 4x5mm, IPC Medium Density", Part Description="High-Speed CAN Transceiver", Part Number=MCP2551-I/SN, Pin Count=8, PressFit=No, Sense=No, SMD=Yes, Socket=No
IC43: library part IFC_MCP2515_TSSOP, "CAN Controller With SPI nterface", Case=TSSOP20, Manufacturer=Microchip, Manufacturer Part Number=MCP2515T-I/ST, Component Type=Standard, Device=MCP2515, Mounted=Yes, PackageDescription="TSSOP 20, Pitch 0.65mm - Body 4.5x6.5mm, IPC Medium Density", Part Description="Stand-Alone CAN Controller with SPI Interface", Part Number=MCP2515T-I/ST, Pin Count=20, SMD=Yes
IC47: "8-bit AVR 20MHz Microcontroller With 32K Bytes In-System  Programmable  Flash", Case=QFN32, Manufacturer=ATMEL, Author=GK, Bonding=No, ComponentHeight=1mm, Component Type=Standard, CreateDate=2011-02-08, Device=ATMEGA328PB-MU, HelpURL=\\cern.ch\dfs\Applications\Altium\Datasheets\ATMEGA328P-MU.pdf, LatestRevisionDate=2014-07-02, Manufacturer Part Number=ATMEGA328PB-MU, Mounted=Yes, PackageDescription="QFN, (MO-220-VHHD-2) 0.50mm pitch,square; 8 pin X 8 pin, 5mm X 5mm X 1.00mm H body (w/thermal tab 3.25 X 3.25mm),  IPC Medium Density", Part Description="8-bit AVR Microcontroller, 32KB Flash, 1KB EEPROM, 2KB SRAM, 32-pin MLF, Industrial Grade (-40°C to 85°C)", Part Number=ATMEGA328PB-MU, Pin Count=33, PressFit=No, Sense=No, SMD=Yes, Socket=No
IC66: "Light Load Improved 1.5A Synch DC/DC Buck Converter", Case=SOT23-6, Manufacturer="DIODES INCORPORATED", Author="CERN DEM JLC", Bonding=No, ComponentHeight=1.1mm, Component Type=Standard, CreateDate=20.03.2018, Device=AP65111AWU-7, HelpURL=\\cern.ch\dfs\Applications\Altium\Datasheets\AP65111AWU-7.pdf, LatestRevisionDate=20.03.2018, Manufacturer Part Number=AP65111AWU-7, Mounted=Yes, PackageDescription="SOT23, 0.95mm pitch; 6 pin, 1.625mm W X 2.90mm L X 1.00mm H body, IPC Medium Density", Part Description="Light Load Improved 1.5A Synch DC/DC Buck Converter", Part Number=AP65111AWU-7, Pin Count=6, PressFit=No, Sense=No, SMD=Yes, Socket=No
IC67: "Dual Operational Amplifier", Case=SOIC8, Manufacturer="TEXAS INSTRUMENTS", Author="CERN DEM JLC", Bonding=No, ComponentHeight=1.75mm, Component Type=Standard, CreateDate=02.12.2008, Device=LM358AD, HelpURL=\\cern.ch\dfs\Applications\Altium\Datasheets\LM358AD.pdf, LatestRevisionDate=13.04.2010, Manufacturer Part Number=LM358AD, Mounted=Yes, PackageDescription="SOIC 8, Pitch 1.27mm - Body 4x5mm, IPC Medium Density", Part Description="Dual Operational Amplifier", Part Number=LM358AD, Pin Count=8, PressFit=No, Sense=No, SMD=Yes, Socket=No
J50: library part PHOENIX_1725672, "Terminal Block, 4 Positions, Screw Connection", Manufacturer="PHOENIX CONTACT", Manufacturer Part Number="1725672 (MPT 0,5/4-2,54)", Author="CERN DEM JMW", ComponentHeight=8.5mm, Component Type=Standard, CreateDate=07.11.2008, HelpURL=\\cern.ch\dfs\Applications\Altium\Datasheets\PHOENIX_1725672.pdf, LatestRevisionDate=26.04.2010, Mounted=Yes, Part Description="6A, 63V, Terminal Block, Pitch 2.54mm, 4 Positions, Screw Connection", Part Number=PHOENIX_1725672, Pin Count=4, PressFit=No, Sense=No, SMD=No, Socket=No, Status=None
J52: library part "CON_2x3 1.27 SMT Male", "1.27 mm dual row goldpin (Maritex)"
J83: library part TYCO_282836-4, "Terminal Block, 4 Positions, Screw Connection", Manufacturer="TYCO ELECTRONICS", Manufacturer Part Number=282836-4, Author="CERN DEM JLC", ComponentHeight=10mm, Component Type=Standard, CreateDate=10.11.2014, HelpURL=\\cern.ch\dfs\Applications\Altium\Datasheets\TYCO_282836-4.pdf, LatestRevisionDate=10.11.2014, Mounted=Yes, Part Description="15.5A, 300V, Terminal Block, Pitch 5mm, 4 Positions, Screw Connection", Part Number=TYCO_282836-4, Pin Count=4, PressFit=No, Sense=No, SMD=No, Socket=No, Status=None
L10: "6,8uH; 900mA; 0,211O; 3x3x1,5mm", Manufacturer=WALSIN, Manufacturer Part Number=WLPN303015M6R8PB, Part Number=IND_6.8UH_20%_WALSIN_WLPN303015M6R8PB, Power=900mA, Resistance=0.21R, Tolerance=±20%, Author=GK, ComponentHeight=1.5, Component Type=Standard, CreateDate=11.07.2016, HelpURL=\\cern.ch\dfs\Applications\Altium\Datasheets\IND_MURATA-PS_8200.pdf, LatestRevisionDate=11.07.2016, Mounted=Yes, Part Description="Miniature Surface Mount Power Inductor (8200 Series)", Pin Count=2, Sense=No, SMD=Yes, Socket=No, Status=None
LD6 LD12: library part LED_KINGBRIGHT_KPH-1608CGCK, "LED Green 1C 2A", Manufacturer=KINGBRIGHT, Manufacturer Part Number=KPH-1608CGCK, Author="CERN DEM JLC", Bonding=No, Color=Green, ComponentHeight=0.65mm, Component Type=Standard, CreateDate=03.07.2017, HelpURL=\\cern.ch\dfs\Applications\Altium\Datasheets\LED_KINGBRIGHT_KPH-1608CGCK.pdf, LatestRevisionDate=03.07.2017, Mounted=Yes, PackageDescription="SMT Green LED, Case 0603, Body L 1.6 x W 0.8mm H 0.65mm", Part Description="SMD Green LED, Case 1.6mmX0.8mm(0603), 0.65mm Thickness", Part Number=LED_KINGBRIGHT_KPH-1608CGCK, Pin Count=2, PressFit=No, Sense=No, SMD=Yes, Socket=No
Q5: "Quartz Crystal 20MHz, 30ppm, 20pF", Manufacturer="SR PASSIVES", Manufacturer Part Number=20M-49SMD-SR, Part Number="SR PASSIVES 20M-49SMD-SR", Author=GK, Bonding=No, ComponentHeight=4.3mm, Component Type=Standard, CreateDate=19.04.2012, HelpURL=\\cern.ch\dfs\Applications\Altium\Datasheets\XTAL_IQD_LFXTAL003166.pdf, LatestRevisionDate=07.11.2016, Mounted=Yes, PackageDescription="HC49/4H SMX Case, SMD Cristal, Body 11.6x4.9mm", Part Description="Tolerance:± 30ppm, Stability:± 50ppm, -10°C to +60°C, 20pF, Surface Mount Quartz Crystal, HC49/4HSMX Series", Pin Count=2, PressFit=No, Sense=No, SMD=Yes, Socket=No
R84 R147 R150 R161 R164 R165 R166 R181 R279 R280 R281: library part R0402_10K_1%_0.0625W_100PPM, "Resistor - 1%", Case=0402, Manufacturer=GENERIC, Manufacturer1 ComponentHeight=0.4mm, Manufacturer1 Example="YAGEO PHYCOMP", Manufacturer1 Part Number=232270671003L, Power=0.0625W, Tolerance=±1%, Author="CERN DEM JLC", Component Type=Standard, HelpURL=\\cern.ch\dfs\Applications\Altium\Datasheets\R0402_Phycomp_RC0402.pdf, Manufacturer Part Number=R0402_10K_1%_0.0625W_100PPM, Mounted=Yes, Part Description="General Purpose Thick Film Chip Resistor", Part Number=R0402_10K_1%_0.0625W_100PPM, Pin Count=2, SMD=Yes, Socket=No, TC=±100ppm/°C
  R84 R147 R150 R181: CreateDate=03.12.2007, LatestRevisionDate=17.10.2012, PressFit=No, Sense=No, Status="Not Recommended"
  R161 R164 R165 R166 R279 R280 R281: CreateDate=2007-12-03, LatestRevisionDate=2012-10-17, Status="Not recommended", Table="Resistors SMD"
R148: library part R0402_4K7_1%_0.0625W_100PPM, "Resistor - 1%", Case=0402, Manufacturer=GENERIC, Manufacturer1 ComponentHeight=0.4mm, Manufacturer1 Example="YAGEO PHYCOMP", Manufacturer1 Part Number=232270674702L, Power=0.0625W, Tolerance=±1%, Author="CERN DEM JLC", Component Type=Standard, CreateDate=03.12.2007, HelpURL=\\cern.ch\dfs\Applications\Altium\Datasheets\R0402_Phycomp_RC0402.pdf, LatestRevisionDate=17.10.2012, Manufacturer Part Number=R0402_4K7_1%_0.0625W_100PPM, Mounted=Yes, Part Description="General Purpose Thick Film Chip Resistor", Part Number=R0402_4K7_1%_0.0625W_100PPM, Pin Count=2, PressFit=No, Sense=No, SMD=Yes, Socket=No, Status="Not Recommended", TC=±100ppm/°C
R152 R153 R275 R276: library part R0402_1K_1%_0.0625W_100PPM, "Resistor - 1%", Case=0402, Manufacturer=GENERIC, Manufacturer1 ComponentHeight=0.4mm, Manufacturer1 Example="YAGEO PHYCOMP", Manufacturer1 Part Number=232270671002L, Power=0.0625W, Tolerance=±1%, Author="CERN DEM JLC", Component Type=Standard, CreateDate=03.12.2007, HelpURL=\\cern.ch\dfs\Applications\Altium\Datasheets\R0402_Phycomp_RC0402.pdf, LatestRevisionDate=17.10.2012, Manufacturer Part Number=R0402_1K_1%_0.0625W_100PPM, Mounted=Yes, Part Description="General Purpose Thick Film Chip Resistor", Part Number=R0402_1K_1%_0.0625W_100PPM, Pin Count=2, PressFit=No, Sense=No, SMD=Yes, Socket=No, Status="Not Recommended", TC=±100ppm/°C
R154 R155 R383: library part R0402_68K_1%_0.0625W_100PPM, "Resistor - 1%", Case=0402, Manufacturer=GENERIC, Manufacturer1 ComponentHeight=0.4mm, Manufacturer1 Example="YAGEO PHYCOMP", Manufacturer1 Part Number=232270676803L, Power=0.0625W, Tolerance=±1%, Author="CERN DEM JLC", Component Type=Standard, CreateDate=03.12.2007, HelpURL=\\cern.ch\dfs\Applications\Altium\Datasheets\R0402_Phycomp_RC0402.pdf, LatestRevisionDate=17.10.2012, Manufacturer Part Number=R0402_68K_1%_0.0625W_100PPM, Mounted=Yes, Part Description="General Purpose Thick Film Chip Resistor", Part Number=R0402_68K_1%_0.0625W_100PPM, Pin Count=2, PressFit=No, Sense=No, SMD=Yes, Socket=No, Status="Not Recommended", TC=±100ppm/°C
R156: library part R0402_13K_1%_0.0625W_100PPM, "Resistor - 1%", Case=0402, Manufacturer=GENERIC, Manufacturer1 ComponentHeight=0.4mm, Manufacturer1 Example="YAGEO PHYCOMP", Manufacturer1 Part Number=232270671303L, Power=0.0625W, Tolerance=±1%, Author="CERN DEM JLC", Component Type=Standard, CreateDate=03.12.2007, HelpURL=\\cern.ch\dfs\Applications\Altium\Datasheets\R0402_Phycomp_RC0402.pdf, LatestRevisionDate=17.10.2012, Manufacturer Part Number=R0402_13K_1%_0.0625W_100PPM, Mounted=Yes, Part Description="General Purpose Thick Film Chip Resistor", Part Number=R0402_13K_1%_0.0625W_100PPM, Pin Count=2, PressFit=No, Sense=No, SMD=Yes, Socket=No, Status="Not Recommended", TC=±100ppm/°C
R158 R159 R162 R163 R277 R278: library part R1206_1M_1%_0.25W_100PPM, "Resistor - 1%", Case=1206, Manufacturer=GENERIC, Manufacturer1 ComponentHeight=0.65mm, Manufacturer1 Example="NIC COMPONENT", Manufacturer1 Part Number=NRC12F1004TRF, Power=0.25W, Tolerance=±1%, Author="CERN DEM JLC", Component Type=Standard, CreateDate=03.12.2007, HelpURL=\\cern.ch\dfs\Applications\Altium\Datasheets\R1206_NIC_NRC.pdf, LatestRevisionDate=13.03.2008, Manufacturer Part Number=R1206_1M_1%_0.25W_100PPM, Mounted=Yes, Part Description="General Purpose Thick Film Chip Resistor", Part Number=R1206_1M_1%_0.25W_100PPM, Pin Count=2, PressFit=No, Sense=No, SMD=Yes, Socket=No, Status=Preferred, TC=±100ppm/°C
RL1 RL2: library part REL_OMRON_G5Q-1-5VDC, "SPDT, Power Relay, 10A Switching Capacity, G5Q-1 Series", Manufacturer="OMRON ELECTRONIC", Manufacturer Part Number=G5Q-1-DC5, Author="CERN DEM MR", ComponentHeight=15.8mm, Component Type=Standard, CreateDate=09.06.2016, HelpURL=\\cern.ch\dfs\Applications\Altium\Datasheets\REL_OMRON_G5Q-1.pdf, LatestRevisionDate=09.06.2016, Mounted=Yes, PackageDescription="5 Leads, Row Spacing 7.62mm; Body 20.3mm x 10.3mm, OMRON_G5Q-1 Series", Part Description="SPDT, Power Relay, 10A Switching Capacity, G5Q-1 Series", Part Number=REL_OMRON_G5Q-1-5VDC, Pin Count=5, PressFit=No, Sense=No, SMD=No, Socket=No, Status=None
T16 T17: "NPN Transistor", Case=SOT23-3, Manufacturer="NXP SEMICONDUCTORS", Author="CERN DEM JLC", Bonding=No, ComponentHeight=1.1mm, Component Type=Standard, CreateDate=28.10.2014, Device=BC817-25, HelpURL=\\cern.ch\dfs\Applications\Altium\Datasheets\BC817-25.pdf, LatestRevisionDate=28.10.2014, Manufacturer Part Number=BC817-25, Mounted=Yes, PackageDescription="SOT23, 3 pin, Pitch 0.95mm - 1.3mm W X 2.9mm L X 1.1mm H, IPC Medium Density", Part Description="45V 500mA NPN General-Purpose Transistor", Part Number=BC817-25, Pin Count=3, PressFit=No, Sense=No, SMD=Yes, Socket=No
TP7 TP8 TP9 TP10: library part SMD_PAD_1.27X1.27MM, Author="CERN DEM JLC", ComponentHeight=0mm, Component Type="Standard (No BOM)", CreateDate=12.01.2008, Family="Test Point", HelpURL=Undefined, LatestRevisionDate=12.01.2008, Mounted=No, PackageDescription="1.27mm x 1.27mm PCB Copper Area (SMD Test Point)", Part Description="1.27mm x 1.27mm PCB Copper Area (SMD Test Point)", Part Number=SMD_PAD_1.27X1.27MM, Pin Count=1, Sense=No, SMD=Yes, Socket=No, Status=None

## Via types
v1: diameter 23.62, hole 11.81, Top to Bot, tented both sides, 72 vias

## Nets (pads, with @x,y where several pads share a name; then routed paths per layer and width w, separated by ;. In a path a pad name is that pad's centre, name@x,y a point inside that pad or via, vN(x,y) a via of type N, cw(c..) or ccw(c..) an arc to the next point about the centre after c; other vN are vias at no path point)
AC_MEAS1: C145.1 IC47.25 R161.2 R165.2 | length 1505.7
  Top w6: R161.2 R165.2 990.68,1381.45 1190.18,1381.45 1193.18,1384.45 1193.49,1384.14 v1(1244.09,1384.14) ; IC47.25 1238.19,927.17 1264.2,901.16 1264.2,785.38 1254.27,775.45 1252.27,777.45 v1(1244.18,777.45) ; v1(1295.18,729.45) 1300.99,723.64 1392.37,723.64 1478.93,810.2 1478.93,1157.1 1394.77,1241.26 1393.37,1241.26 v1@1357.68,1276.95
  Bot w6: v1(1244.09,1384.14) 1248.87,1384.14 1249.18,1384.45 1347.18,1286.45 1347.18,1274.86 v1(1350.39,1271.64) ; v1(1244.18,777.45) 1292.18,729.45 v1(1295.18,729.45)
AC_MEAS2: C196.1 IC47.26 R279.2 R280.2 | length 1561.3
  Top w6: R279.2 870.17,1300.95 R280.2 943.39,1263.94 C196.1 945.89,1264.73 962.18,1281.02 962.56,1280.64 979.8,1280.64 1003.39,1304.22 1003.39,1352.73 1013.99,1363.33 1019.06,1363.33 1025.18,1369.45 1207.75,1369.45 1213.56,1363.64 1235.17,1363.64 1235.47,1363.33 1252.71,1363.33 1269.48,1363.33 1274.75,1358.06 1274.75,1350.38 1329.58,1295.55 1329.58,1263.02 1363.35,1229.26 1389.8,1229.26 1466.93,1152.13 1466.93,833.2 1378.18,744.45 v1(1329.18,744.45) ; IC47.26 1255.06,964.57 1278.18,941.45 v1@1278.18,795.45
  Bot w6: v1(1285.18,799.45) 1285.18,795.13 1329.18,751.13 v1(1329.18,744.45)
CAN_CSn: IC43.18 IC47.19 | length 110.7
  Top w6: IC43.18 1067.2,850.67 1081.5,864.96 1084.69,864.96 1099.65,879.92 1112.2,879.92 1112.2,880.02 1111.08,881.14 1111.08,906.35 IC47.19@1112.2,907.48
CAN_INT: IC43.13 IC47.1 | length 591.4
  Top w6: IC43.13 1197.98,822.77 1197.98,776.65 1211.18,763.45 1228.75,763.45 1237.56,754.64 1251.34,754.64 1275.34,778.64 1293.8,778.64 1305.99,790.83 1305.99,987.13 1299.96,993.16 1299.96,1013.24 1288.37,1024.83 1288.37,1042.07 1292.46,1046.16 1292.46,1073.94 1289.82,1076.59 1289.82,1087.24 1276.27,1100.8 1271.15,1100.8 1244.84,1127.1 1227.5,1127.1 IC47.1
CAN_MISO: IC43.17 IC47.23 | length 270.3
  Top w6: IC43.17 1092.79,782.56 1099.77,775.58 v1(1177.16,775.58) ; v1(1189.67,891.04) 1189.67,905.7 1190.94,906.98 1190.69,907.23 IC47.23@1190.94,907.48
  Bot w6: v1(1177.16,775.58) 1177.16,865.35 1176.38,866.14 1177.16,866.14 1190.7,879.68 1190.94,879.94 1189.67,881.21 v1(1189.67,891.04)
CAN_MOSI: IC43.16 IC47.22 | length 125.4
  Top w6: IC43.16 1118.39,862.48 1124.86,868.95 1160.29,868.95 1169.88,878.54 1169.88,881.4 1168.86,882.42 1168.86,905.08 IC47.22@1171.26,907.48
CAN_SCK: IC43.14 IC47.24 | length 110.3
  Top w6: IC43.14 1169.57,859.33 1180.47,870.23 1198.29,870.23 1211.76,883.7 1211.76,906.35 IC47.24@1210.63,907.48
CANH: D31.1 IC42.7 J50.2 | length 422.6
  Top w10: J50.2 1061.18,278.19 1137.8,354.8 1137.8,429.13 v1(1161.42,452.76) 1173.11,464.45 IC42.7
  Bot w10: v1(1161.42,452.76) 1188.98,480.31 D31.1
CANL: D31.2 IC42.6 J50.3 | length 329.2
  Top w10: J50.3 1161.18,413.15 v1(1161.42,413.39) 1162.48,414.45 IC42.6
  Bot w10: v1(1161.42,413.39) 1188.98,413.39 D31.2
GND: C134.1 C135.1 C136.1 C137.1 C138.2 C139.1 C141.1 C142.1 C143.1 C145.2 C146.2 C147.2 C194.2 C196.2 C197.2 D31.3 D34.2 D64.2 D70.2 IC41.1 IC41.2 IC41.3 IC41.4 IC41.7 IC42.2 IC43.10 IC47.5 IC47.21 IC47.33 IC66.2 IC67.4 J50.4 J52.6 LD6.1 LD12.1 R148.1 R156.1 R164.2 R165.1 R280.1 T16.2 T17.2 TP8.1 | length 2724.1
  Top w10: C142.1 182.18,1289.45 206.18,1313.45 v1(206.18,1324.45) ; v1(292.18,1379.45) 312.52,1379.45 313.18,1380.11 ; D70.2 313.18,1380.11 ; R164.2 330.11,1380.11 313.18,1380.11 ; C143.1 367.18,1251.26 487.99,1251.26 v1(491.18,1254.45) ; v1(574.18,1376.45) 576.18,1378.45 IC67.4 713.18,1378.45 725.3,1366.33 D34.2 ; v1(810.63,1228.35) C197.2 ; v1(839.18,1335.45) 840.47,1336.73 C146.2 ; v1(879.27,882.79) 879.27,879.27 875.98,875.98 889.76,862.2 C194.2 ; C138.2 915.35,937.4 942.52,964.57 v1(954.72,964.57) C134.1 ; v1(944.88,500) 944.88,481.1 R156.1 ; v1(945.18,1127.45) 946.65,1125.98 T17.2 ; C135.1 954.72,471.26 R156.1 ; v1(971.18,1301.45) 970.68,1300.95 C196.2@944.97,1300.95 ; R165.1 946.97,1335.94 C145.2 946.18,1302.17 C196.2@944.97,1300.95 ; v1(1070,442.91) 1048.46,464.45 IC42.2 968.39,464.45 960.39,472.44 R156.1 ; C139.1 1131.89,1143.7 IC47.5 1131.89,1023.62 v1(1141.73,1013.78) 1151.57,1003.94 IC47.21 ; IC47.33@1181.1,974.41 1190.94,974.41 v1(1190.94,964.57) ; J52.6 1275.07,1239.37 1289.18,1253.48 1289.18,1289.17 v1(1289.37,1289.36) ; IC43.10 1268.9,593.31 v1(1271.65,590.55) ; v1(1328.74,344.49) 1328.74,382.68 R148.1 C136.1 1370.08,338.58 D64.2 ; LD6.1 1390.18,1048.79 C137.1 1425.52,1043.31 LD12.1 v1(1442.18,1008.45) ; C196.2@944.97,1300.95 R280.1 907.97,1300.17 C196.2 C196.2@944.97,1300.95
  Bot w6: IC41.7 1118.11,1247.05 1111.22,1240.16 1111.22,1212.67 1121.48,1202.4 1132.73,1202.4 1157.48,1177.65 1157.48,1164.89
  Bot w10: v1@881.17,880.64 895.17,866.64 895.17,803.98 885.65,794.46 885.65,735.6 895.17,726.08 895.17,719 905.51,708.66 925.2,708.66 938.98,694.88 938.98,655.51 IC66.2 v1(944.88,500) ; IC41.1 964.24,1221.46 971.18,1228.4 971.18,1248.09 ; IC41.2 970.14,1247.05 971.18,1248.09 ; IC41.3 968.5,1272.64 971.18,1275.31 ; IC41.4 967.96,1298.23 v1(971.18,1301.45) 971.18,1275.31 ; v1(1070,442.91) D31.3 ; C147.2 1181.1,944.88 1190.94,954.72 v1(1190.94,964.57) ; v1@1286.66,1286.66 v1(1289.37,1289.36) ; 971.18,1248.09 971.18,1275.31
  other v1: 1092.52,964.57 1092.52,1062.99 1190.94,1062.99
NetC136_2: C136.2 IC43.9 Q5.1 | length 521.1
  Top w6: IC43.9 1220.75,649.88 1250,679.13 1358.27,679.13 1377.95,659.45 Q5.1 1377.95,413.12 1405.51,385.56 C136.2
NetC137_2: C137.2 IC43.8 Q5.2 | length 558.4
  Top w6: IC43.8 1195.16,683.35 1238.45,726.64 1262.94,726.64 1286.94,750.64 1305.4,750.64 1333.99,779.23 1333.99,786.45 1377.95,830.41 Q5.2 1360.24,923.23 1360.24,1010.81 1360.49,1011.06 1360.49,1043.06 C137.2
NetC140_1: C140.1 IC66.4 | length 312.6
  Bot w10: IC66.4 911.17,765.5 911.17,799.95 947.83,836.61 1062.99,836.61 1064.54,835.06 1064.54,790.33 1043.31,769.09 1043.31,740.16
NetC140_2: C140.2 IC66.3 L10.1 | length 259.2
  Top w10: v1(915.35,629.91) 915.35,634.06 905.51,643.9 L10.1 935.04,673.43 935.04,698.82 944.88,708.66 v1(1000,708.66)
  Bot w10: IC66.3 907.48,622.05 v1(915.35,629.91) ; v1(1000,708.66) 1005.48,703.17 1031.08,703.17 C140.2 C140.2@1050.2,684.06
NetC141_2: C141.2 D32.1 IC66.1 R383.2 | length 624.4
  Top w10: D32.1 846.46,241.73 846.46,399.28 v1(878.11,430.94) ; v1(905.51,580.7) 905.51,590.55 907.48,592.52 C141.2 ; C141.2@949.8,587.6 974.41,612.21 v1(976.38,612.21)
  Bot w10: v1(878.11,430.94) 878.11,435.2 895.17,452.26 895.17,570.36 v1(905.51,580.7) ; v1(976.38,612.21) 982.28,618.11 IC66.1 982.51,655.74 1065.04,655.74 1071.87,662.57 1082.65,662.57 R383.2
NetC144_1: C144.1 IC67.1 R166.1 | length 105.8
  Top w6: IC67.1 742.46,1228.45 C144.1
NetC144_2: C144.2 D33.2 D34.1 | length 111.3
  Top w6: D34.1 769.06,1276.57 779.9,1265.73 ; C144.2 779.9,1265.73 ; D33.2 814.63,1274.02 788.18,1274.02 779.9,1265.73
NetC146_1: C146.1 D33.1 R161.1 | length 109.4
  Top w6: D33.1 863.35,1366.33 C146.1 872.96,1372.16 R161.1
NetC147_1: C147.1 IC47.20 | length 85.9
  Top w10: v1(1131.89,889.76) IC47.20
  Bot w10: C147.1 1124.02,897.64 v1(1131.89,889.76)
NetC195_1: C195.1 IC67.7 R281.1 | length 159.8
  Top w6: C195.1 331.9,1267.17 349.68,1284.94 R281.1 420.39,1284.94 IC67.7
NetC195_2: C195.2 D69.2 D70.1 | length 115.1
  Top w6: D69.2 308.18,1257.57 D70.1 310.69,1250.08 310.69,1226.68 C195.2
NetC197_1: C197.1 D69.1 R279.1 | length 776.6
  Top w6: D69.1 247.18,1322.13 264.52,1304.8 330.93,1304.8 345.98,1319.84 345.98,1340.63 359.8,1354.45 472.18,1354.45 520.18,1306.45 828.18,1306.45 838.18,1296.45 838.18,1277.45 851.68,1263.95 R279.1 869.18,1241.05 C197.1
NetD65_1: D65.1 D66.1 D68.3 | length 473.6
  Top w6: v1(180.18,990.45) 192.18,978.45 v1(540.18,978.45)
  Bot w6: v1(180.18,990.45) 180.18,1011.28 D65.1 ; v1(540.18,978.45) 540.18,1000.76 D66.1 D68.3
NetD65_2: D65.2 RL1.1 T16.3 | length 210
  Bot w6: D65.2 92.91,1120.87 RL1.1 T16.3@155.91,1137.4
NetD66_2: D66.2 RL2.1 T17.3 | length 776.3
  Top w6: v1(466.18,1056.73) 571.03,1056.73 573.56,1059.26 608.99,1059.26 629.47,1038.78 698.63,1038.78 742.18,1082.33 v1(742.18,1096.99) ; v1(741.18,1169.45) 757.5,1185.77 824.43,1185.77 837.56,1172.64 854.8,1172.64 866.99,1184.83 913.18,1184.83 935.04,1206.69 T17.3
  Bot w6: D66.2 447.24,1037.8 v1(466.18,1056.73) 466.18,1103.98 RL2.1 ; v1(741.18,1169.45) 741.18,1097.99 v1(742.18,1096.99)
NetIC42_1: IC42.1 IC43.1 | length 79.3
  Top w10: IC42.1 1016.02,515.59 IC43.1
NetIC42_4: IC42.4 IC43.2 | length 303.2
  Top w10: IC42.4 1050.48,364.45 1092.81,406.78 1092.81,472.44 1073.23,492.02 1073.23,520.49 1054.35,539.37 1054.35,546.76 1041.61,559.5 IC43.2
NetIC42_8: IC42.8 R148.2 | length 186.8
  Top w10: IC42.8 1278.86,514.45 1290.55,502.76 R148.2
NetIC43_19: IC43.19 R147.2 | length 91.4
  Top w6: R147.2@994.09,896.85 994.9,896.85 1041.61,850.13 IC43.19
NetIC47_32: IC47.32 R181.1 | length 119.3
  Top w6: v1(1236.22,1106.29) 1236.22,1102.63 1238.19,1104.6 IC47.32 ; v1@1284.85,1163.94 v1(1284.85,1156.12) 1298.01,1156.12
  Bot w6: v1(1236.22,1106.29) 1236.22,1107.49 v1(1284.85,1156.12)
NetIC66_5: IC66.5 R383.1 | length 234.1
  Bot w6: IC66.5 944.88,712.6 950.79,706.69 967.66,706.69 988.19,686.17 996.84,686.17 1001.9,681.1 1016.01,681.1 1027.37,669.74 1059.24,669.74 1064.51,675.01 1064.51,685.04 1086.95,707.48 R383.1
NetIC66_6: IC66.6 R155.1 | length 54.7
  Bot w10: IC66.6 982.28,784.25 R155.1
NetIC67_2: IC67.2 R159.2 R166.2 | length 738.7
  Top w6: R166.2 685.68,1278.45 IC67.2 592.18,1278.45 585.18,1271.45 585.18,1214.05 603.78,1195.45 721.18,1195.45 723.5,1197.77 841.86,1197.77 v1(846.18,1193.45) ; v1(787.4,990.45) 787.4,1039.67 795.18,1047.45 795.18,1061.45 789.18,1067.45 v1(788.18,1067.45)
  Bot w6: R159.2 v1(787.4,990.45) ; v1(788.18,1067.45) 795.18,1067.45 816.76,1089.03 819.64,1089.03 860.18,1129.57 860.18,1179.45 v1(846.18,1193.45)
NetIC67_3: IC67.3 IC67.5 R163.2 R164.1 | length 1201.8
  Top w6: v1(236.22,838.58) 145.67,929.13 145.67,1243.02 159.1,1256.45 209.06,1256.45 226.99,1274.39 226.99,1355.69 224.41,1358.27 224.41,1366.14 236.22,1377.95 264.25,1377.95 291.34,1350.86 291.34,1330.71 295.13,1326.92 295.13,1322.07 300.4,1316.8 325.96,1316.8 333.98,1324.81 333.98,1345.6 368.9,1380.52 R164.1 ; R164.1@366.69,1384.45 372.68,1378.45 IC67.5 502.18,1378.45 552.18,1328.45 IC67.3
  Bot w6: v1(236.22,838.58) 246.06,828.74 R163.2
NetIC67_6: IC67.6 R278.2 R281.2 | length 700.3
  Top w6: R281.2 373.68,1328.45 IC67.6 475.18,1328.45 559.98,1243.65 559.98,1205.27 598.18,1167.06 v1(598.18,1118.45) ; v1(591.18,1038.45) 591.18,906.55 641.73,856 v1(640.18,854.45)
  Bot w6: v1(591.18,1038.45) 598.18,1045.45 v1(598.18,1118.45) ; v1(640.18,854.45) 641.73,852.9 R278.2
NetJ83_1: J83.1 RL1.2 | length 607.5
  Top w50: RL1.2 206.69,607.09 206.69,423.23 127.95,344.49 J83.1
NetLD6_2: LD6.2 R84.2 | length 45.9
  Top w6: R84.2 1354.42,1173.93 LD6.2
NetLD12_2: LD12.2 R181.2 | length 107.5
  Top w6: R181.2 1379.45,1144.45 1384.18,1149.18 1415.45,1149.18 1439.7,1124.93 LD12.2
NetR154_1: R154.1 R155.2 R156.2 | length 467.2
  Top w6: R154.1 915.35,506.96 915.21,507.1 915.21,559.55 920.49,564.82 969.28,564.82 997.19,592.73 997.19,632.54 1022.07,657.43 1022.07,716.02 1010.92,727.17 v1(1010.92,771.35)
  Bot w6: v1(1010.92,771.35) 1010.8,771.35 1009.18,772.96 1042.13,805.91 R155.2
NetR158_2: R158.2 R159.1 | length 72.8
  Bot w10: R158.2 R159.1
NetR162_2: R162.2 R163.1 | length 96.9
  Bot w10: R162.2 206.69,654.96 232.83,681.1 R163.1
NetR275_2: R275.2 T16.1 | length 48.9
  Bot w6: T16.1 298.52,1169.29 R275.2
NetR276_2: R276.2 T17.1 | length 57.6
  Top w6: R276.2 887.01,1115.35 T17.1
NetR277_2: R277.2 R278.1 | length 91.4
  Bot w10: R277.2 639.76,698.82 R278.1
NetRL1_4: RL1.4 RL2.2 | length 251
  Bot w50: RL1.4 376.38,614.17 RL2.2
P5V0: C134.2 C135.2 C138.1 C139.2 C142.2 C143.2 C194.1 D68.1 IC41.8 IC42.3 IC43.20 IC47.4 IC47.18 IC67.8 J52.2 L10.2 R84.1 R147.1 R150.1 R152.2 R153.2 R154.2 RL1.5 RL2.5 TP7.1 | length 4365.6
  Top w6: 192.18,1177.45 229.37,1140.26 ; C143.2 369.15,1214.73 382.87,1228.45 IC67.8 ; R154.2 C135.2@951.97,394.88 ; C194.1 960.63,891.73 C134.2 956.43,897.64 975.93,917.14 989.87,917.14 995.42,922.69 1028.35,889.76 1092.52,889.76 IC47.18 ; IC43.20 1016.02,797.88 1022.4,797.88 1023.76,796.52 1023.76,793.32 1029.03,788.05 1034.59,782.49 ; IC47.4 1151.57,1143.7 C139.2 1179.13,1171.26 v1(1190.94,1171.26) ; v1(1161.41,1326.77) 1190.27,1326.77 1202.87,1339.37 J52.2 1261.32,1339.37 1290.52,1310.17 1297.99,1310.17 1310.18,1297.98 1310.18,1251.12 1263.77,1204.72 1262.25,1204.72 v1(1255.9,1204.72)
  Top w10: 855.68,1063.95 862.4,1057.23 875,1044.63 889.76,1044.63 ; C138.1 C134.2 ; C135.2@951.97,394.88 C135.2@952.76,394.88 ; C135.2@952.76,395.67 C135.2 C135.2@964.57,397.64 ; IC42.3 997.13,414.45 977.56,394.88 C135.2@952.76,394.88 ; 1034.59,782.49 1034.59,768.45 1080.71,722.33 ; v1(1081.22,639.66) 1081.22,721.82 1080.71,722.33 ; v1(1082.68,543.3) 1084.65,543.3 1121.18,506.77 1121.18,396.77 1047.24,322.83 980.31,322.83 952.76,350.39 C135.2@952.76,394.88 ; R84.1 1290.55,1200.79 1266.18,1200.79 1262.25,1204.72 1257.52,1209.45 1255.9,1207.83 v1(1255.9,1204.72) 1255.37,1204.18 1255.37,1153.34 1281.92,1126.8 1287.04,1126.8 1292.59,1121.24 1320.69,1121.24 1332.65,1109.28 1332.65,1101.04 1347.24,1086.45 1337.03,1076.24 1337.03,1027.79 v1@1319.99,1010.75 ; v1@1319.99,1000 1319.99,785.03 1299.6,764.64 1281.14,764.64 1257.14,740.64 1231.76,740.64 1227.06,745.34 1157.07,745.34 1134.06,722.33 1080.71,722.33
  Top w20: C142.2 189.18,1217.95 189.18,1174.45 ; 229.37,1140.26 RL1.5@373.52,1140.26 ; C143.2 360.1,1207.65 360.1,1153.68 RL1.5@373.52,1140.26 ; v1(685.04,1071.59) 658.68,1097.95 639.68,1097.95 ; 855.68,1063.95 799.61,1120.02 RL2.5 679.13,1137.4 639.68,1097.95 ; 889.76,1044.63 921,1044.63 934.07,1031.56 ; C138.1 909.4,897.64 902.17,904.87 896.52,904.87 882.46,918.93 882.46,933.07 887.15,937.76 887.15,951.9 934.07,998.83 934.07,1031.56 ; L10.2 925.2,789.37 C194.1@960.63,824.8 ; 926.87,992.38 927.8,991.45 935.18,998.83 935.18,1030.45 934.07,1031.56 ; C194.1 971.65,825.59 IC43.20 ; v1@1266.18,1200.79 1310.18,1244.79 1310.18,1270.84 1310.48,1271.15 ; v1@1319.99,1000 1319.99,1003.05 v1(1320.77,1003.83) ; RL1.5@373.52,1140.26 RL1.5 428.74,1189.76 450.6,1189.76 453.61,1192.77 545.6,1192.77 561.18,1177.19 561.18,1115.45 585.99,1090.64 632.37,1090.64 639.68,1097.95
  Bot w6: RL1.5@350.39,1111.42 RL1.5 RL1.5@400.13,1137.4 ; D68.1 v1(685.04,1071.59) ; v1@1161.35,1318.95 v1@1161.41,1319.01 ; v1(1161.41,1326.77) v1@1161.41,1319.01 ; R152.2 1179.8,1337.4 v1@1161.41,1319.01
  Bot w10: v1(1081.22,639.66) 1081.22,545.78 1080.71,545.27 v1(1082.68,543.3) ; IC41.8 1187.99,1221.46 ; v1(1190.94,1171.26) 1190.94,1221.46 ; v1(1255.9,1204.72) 1239.16,1221.46 1190.94,1221.46 ; 1187.99,1221.46 1190.94,1221.46 ; 1187.99,1221.46 1190.94,1224.41 1190.94,1221.46
  Bot w20: v1(1320.77,1003.83) TP7.1@1370.08,1003.83
P12V0: D32.2 D64.1 J50.1 | length 606
  Top w10: D32.2 913.86,142.13 J50.1
  Top w20: J50.1 1032.52,118.11 1328.74,118.11 1342.52,131.89 D64.1
PROG_MISO: IC47.16 J52.1 | length 661.6
  Top w6: IC47.16 1026.55,944.88 1001.78,969.65 1001.78,973.38 967.37,1007.78 967.37,1059.72 1005.25,1097.6 1005.25,1154.37 983.13,1176.49 983.13,1248.78 999.76,1265.41 1127.61,1265.41 1134.35,1272.15 1134.35,1325.94 1120.92,1339.37 J52.1
PROG_MOSI: IC47.15 J52.4 | length 540.2
  Top w6: IC47.15 1027.56,964.57 979.37,1012.76 979.37,1054.75 1017.25,1092.63 1017.25,1159.34 1011.62,1164.97 1011.62,1180.32 1024.76,1193.46 1030.86,1193.46 1052.81,1215.41 1115.93,1215.41 1151.57,1251.05 1151.57,1279.53 1161.42,1289.37 J52.4
PROG_SCK: IC47.17 J52.3 | length 547.6
  Top w6: J52.3 1005.5,1289.37 984.77,1268.64 983.21,1268.64 971.13,1256.56 971.13,1171.52 993.25,1149.4 993.25,1102.57 955.37,1064.69 955.37,1002.81 989.78,968.4 989.78,953.62 998.97,944.43 1010.03,944.43 1037.14,917.32 IC47.17
REL1: IC47.11 R275.1 | length 908.4
  Top w6: v1(303.18,1112.45) 338.18,1077.45 457.47,1077.45 464.28,1084.26 565.5,1084.26 578.12,1071.64 613.59,1071.64 634.44,1050.78 693.66,1050.78 721.37,1078.49 721.37,1105.61 733.56,1117.8 750.8,1117.8 751.24,1117.37 779.57,1089.03 803.03,1089.03 809.37,1082.69 809.37,1056.96 825.69,1040.64 859.19,1040.64 884.09,1015.74 v1(905.51,1015.74)
  Top w10: v1(1000.18,1030.45) 1017.37,1030.45 1027.45,1040.53 1042.5,1040.53 IC47.11
  Bot w6: R275.1 300.18,1115.45 v1(303.18,1112.45) ; v1(905.51,1015.74) 985.46,1015.74 v1(1000.18,1030.45)
REL2: IC47.10 R276.1 | length 143.2
  Top w6: R276.1 941.34,1090.16 v1(941.34,1090.94) ; v1(1020.25,1063.34) 1044.39,1063.34 1044.74,1062.99 1045.01,1063.26 IC47.10
  Bot w6: v1(941.34,1090.94) 969.02,1063.26 v1@1022.37,1063.26
RESETn: IC47.29 J52.5 R150.2 | length 650.8
  Top w6: v1(1003.94,1240.16) 1004.72,1239.37 J52.5 ; v1(1033.38,1172.64) 1042.91,1172.64 1073.68,1203.41 1120.9,1203.41 1121.56,1204.07 1204.54,1204.07 1223.76,1184.85 1223.76,1165.16 1276.12,1112.8 1281.24,1112.8 1286.79,1107.24 1303.79,1107.24 1309.06,1101.98 1309.06,1033.45 1309.18,1033.33 v1(1309.18,1033.45) ; IC47.29 1251.58,1023.62 1262.56,1012.64 1267.99,1012.64 1273.18,1007.45 v1(1273.18,1000.45)
  Bot w6: v1(1003.94,1240.16) 1003.94,1202.08 v1(1033.38,1172.64)
  Bot w10: v1(1273.18,1000.45) 1276.18,1000.45 v1(1309.18,1033.45)
Rx: IC47.30 TP10.1 | length 157.5
  Top w6: IC47.30 1239.14,1044.26 v1@1267.56,1044.26 ; v1(1267.56,1038.62) 1267.63,1038.62 1271.99,1034.26 v1@1271.99,1044.26
  Bot w6: v1@1267.56,1037.07 v1(1267.56,1038.62) 1276.39,1047.45 1293.75,1047.45 1300.56,1054.26 1325.91,1054.26 1342.52,1070.87 TP10.1@1342.52,1092.52
SCL1: IC41.6 IC47.6 R153.1 | length 304.4